# EAGLE board source_eagle (EAGLE 9.6.2)
REV: B
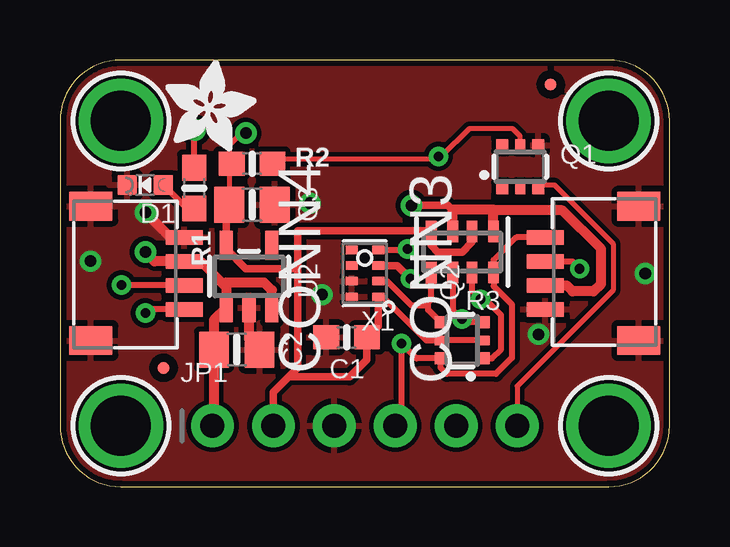
[diagram p0: board, top side]
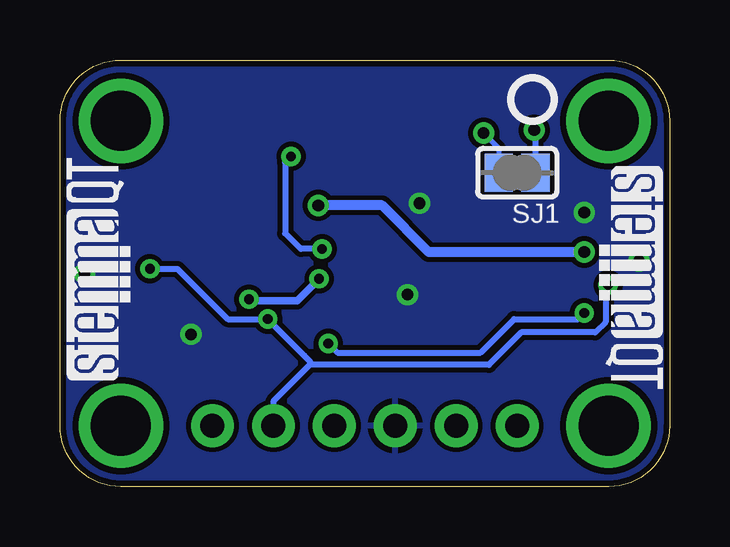
[diagram p1: board, bottom side, seen from below]

Size 25.4 x 17.78 mm. Coordinates in mm from the lower left corner, seen from the top.
Outline: 0,15.24 0,2.54 arc90 2.54,0 22.86,0 arc90 25.4,2.54 25.4,15.24 arc90 22.86,17.78 2.54,17.78 arc90 0,15.24
Copper layers (1*16): Top 0.035mm / dielectric 1.5mm / Bottom 0.035mm
Design rules "adafruit *": minimum track width 8mil, minimum drill 15.5mil, track to track 8mil, track to pad 8mil, pad to pad 8mil, via to via 8mil, smd to smd 8mil, copper to edge 10mil, drill to drill 8mil, minimum pad ring 10mil, minimum via ring 8mil, stop-mask expansion 2mil, vias tented up to drill 20mil, thermal gap 10mil
Net classes: 1 highpower: width 0.305 mm, drill 0.483 mm; 2 lowpower: width 0.254 mm, drill 0.483 mm

## Footprints (pad centres in the part's own frame; a part is rotated, then mirrored left to right if it is on the bottom)
0603-NO = smd 1.075 x 1: 1 -0.85,0; 2 0.85,0
0805-NO = smd 1.24 x 1.5: 1 -0.95,0; 2 0.95,0
JST_SH4 = smd 0.6 x 1.55: 1 -1.5,2.006; 2 -0.5,2.006; 3 0.5,2.006; 4 1.5,2.006 | smd 1.2 x 1.8: MT1 -2.8,-1.894; MT2 2.8,-1.894
CHIPLED_0603_NOOUTLINE = smd 0.8 x 0.8: A 0,-0.75; C 0,0.75
FIDUCIAL_0.5MM = smd 0.5 x 0.5: 1 0,0
1X06_ROUND_70 = drill 1 pad 1.778: 1 -6.35,0; 2 -3.81,0; 3 -1.27,0; 4 1.27,0; 5 3.81,0; 6 6.35,0
SOT363 = smd 0.5 x 0.5: 1 -0.75,-0.9; 3 0.75,-0.9; 4 0.75,0.9; 6 -0.75,0.9 | smd 0.4 x 0.5: 2 0,-0.9; 5 0,0.9
RESPACK_4X0603 = smd 0.45 x 0.9: 1 -1.3,-0.85; 2 -0.4,-0.85; 3 0.4,-0.85; 4 1.3,-0.85; 5 1.3,0.85; 6 0.4,0.85; 7 -0.4,0.85; 8 -1.3,0.85
SOLDERJUMPER_CLOSEDWIRE = smd 1.168 x 1.6: 1 -0.762,0; 2 0.762,0 | smd 0.635 x 0.203: WIRE 0,0
SOT23-5 = smd 0.55 x 1.2: 1 -0.95,-1.3; 2 0,-1.3; 3 0.95,-1.3; 4 0.95,1.3; 5 -0.95,1.3
MOUNTINGHOLE_2.5_PLATED = drill 2.5 pad 3.2: P$1 0,0
TCS34303 = smd 0.5 x 0.35: 1 -0.55,0.975; 2 -0.55,0.325; 3 -0.55,-0.325; 4 -0.55,-0.975; 5 0.55,-0.975; 6 0.55,-0.325; 7 0.55,0.325; 8 0.55,0.975

## Placement (x,y rotation side)
C1  0.1uF  [0603-NO]  11.94,6.22 180 top
C2  10uF  [0805-NO]  7.37,5.71 0 top
C3  10uF  [0805-NO]  8,11.75 0 top
CONN3  STEMMA_I2C_QT  [JST_SH4]  22.23,8.89 90 top
CONN4  STEMMA_I2C_QT  [JST_SH4]  3.17,8.89 270 top
D1  RED  [CHIPLED_0603_NOOUTLINE]  3.56,12.57 90 top
FID3  FIDUCIAL_0.5MM  [FIDUCIAL_0.5MM]  4.32,4.95 0 top
FID4  FIDUCIAL_0.5MM  [FIDUCIAL_0.5MM]  20.45,16.76 0 top
JP1  [1X06_ROUND_70]  12.7,2.54 0 top
PLABEL0  [PLABEL0]  6.35,0.89 0 top
PLABEL1  [PLABEL1]  8.89,4.19 0 top
PLABEL2  [PLABEL2]  11.43,0.89 0 top
PLABEL3  [PLABEL3]  13.97,4.19 0 top
PLABEL4  [PLABEL4]  16.51,0.89 0 top
PLABEL5  [PLABEL5]  19.18,4.06 0 top
PLABEL6  [PLABEL6]  13.59,16.64 0 top
PLABEL7  [PLABEL7]  0.38,12.45 0 top
PLABEL8  [PLABEL8]  12.95,13.84 0 top
PLABEL9  [PLABEL9]  12.7,1.02 0 bottom
PLABEL10  [PLABEL10]  9.53,13.34 0 bottom
PLABEL11  [PLABEL11]  14.13,15.97 0 bottom
PLABEL12  [PLABEL12]  12.57,10.03 0 bottom
PLABEL13  [PLABEL13]  12.95,5.46 0 bottom
Q1  BSS138  [SOT363]  19.18,13.34 0 top
Q2  BSS138  [SOT363]  16.76,6.1 90 top
R1  10K  [0603-NO]  5.59,12.45 270 top
R2  10K  [0603-NO]  8,13.46 0 top
R3  10KPack  [RESPACK_4X0603]  16.76,9.78 180 top
SJ1  [SOLDERJUMPER_CLOSEDWIRE]  6.35,13.08 180 bottom
U2  AP2127K-1.8  [SOT23-5]  7.87,8.76 0 top
U$1  MOUNTINGHOLE2.5  [MOUNTINGHOLE_2.5_PLATED]  2.54,15.24 0 top
U$9  MOUNTINGHOLE2.5  [MOUNTINGHOLE_2.5_PLATED]  2.54,2.54 0 top
U$17  MOUNTINGHOLE2.5  [MOUNTINGHOLE_2.5_PLATED]  22.86,15.24 0 top
U$20  MOUNTINGHOLE2.5  [MOUNTINGHOLE_2.5_PLATED]  22.86,2.54 0 top
U$22  [ADAFRUIT_3.5MM]  4.38,13.97 0 top
U$25  [PCBFEAT-REV-040]  5.71,16.13 0 bottom
U$30  [STEMMAQT]  22.48,4.45 90 bottom
U$31  [STEMMAQT]  2.92,13.34 270 bottom
X1  TCS34303  [TCS34303]  12.7,8.89 180 top

## Library data of the parts
C1-C3 FID3 FID4 JP1 R1-R3 SJ1 U$22 U$25 = microbuilder
CONN3 CONN4 = adafruit_electromech; LCSC: C2845363
D1 Q1 Q2 = microbuilder; JLC_ROTATION: 270
PLABEL0 PLABEL1-PLABEL13 = pinguin
U2 = adafruit_power; JLC_ROTATION: 270
U$1 U$9 U$17 U$20 = adafruit_electromech; BOM: EXCLUDE
U$30 U$31 = silks
X1 = adafruit_sensor

## Nets
1.8V: C1.1 C3.1 JP1.2 Q2.2 Q2.5 R2.1 R3.2 R3.4 SJ1.2 U2.5 X1.1
GND [highpower]: C1.2 C2.2 C3.2 CONN3.1 CONN3.MT1 CONN3.MT2 CONN4.1 CONN4.MT1 CONN4.MT2 D1.C JP1.3 Q1.4 U2.2 X1.7 X1.8
INT: JP1.6 Q1.3
INT_1.8V: Q1.5 R2.2 X1.4
N$1: D1.A R1.2
N$2 [lowpower]: R1.1 SJ1.1
SCL: CONN3.4 CONN4.4 JP1.4 Q2.6 R3.8
SCL_1.8V: Q2.1 R3.7 X1.3
SDA: CONN3.3 CONN4.3 JP1.5 Q2.3 R3.6
SDA_1.8V: Q2.4 R3.5 X1.2
VCC [highpower]: C2.1 CONN3.2 CONN4.2 JP1.1 R3.1 R3.3 U2.1 U2.3

## Tracks (layer width: path | path; a pad name or v marks a point on that pad's centre or on a via)
1.8V  (via drill 0.48)
  Top 0.203: v7.75,14.73 7.56,14.73 7.05,14.23 7.05,13.46 | 7.05,13.46 C3.1 | R2.1 7.05,13.46
  Top 0.254: Q2.2 Q2.5 15.27,6.1 13.45,7.92 X1.1 | R3.2 17.16,10.18
  Top 0.305: 17.16,10.18 16.76,9.78 15.75,9.78 15.46,10.06 R3.4 15.46,10.67 9.91,10.67 9.91,9.08 | X1.1 13.25,6.68 C1.1 12.79,5.29 12.06,4.57 9.53,4.57 | C3.1 6.92,11.62 U2.5 6.92,9.91 7.75,9.08 9.91,9.08 | 9.53,4.57 9.91,4.95 9.91,9.08 | 9.53,4.57 8.89,3.94 JP1.2
  Bottom 0.203: v7.75,14.73 7.11,14.1 SJ1.2
GND  (via drill 0.48)
  Top 0.406: U2.2 7.87,6.16 C2.2 | CONN4.1 4.6,10.39 v3.56,11.43
  other vias: 19.94,6.35 1.27,9.4 24.38,8.89 10.41,11.81 10.92,8
  pour Top: 0,17.78 25.4,17.78 25.4,0 0,0
  pour Bottom: 0,17.78 25.4,17.78 25.4,0 0,0
INT
  Top 0.203: Q1.3 20.07,12.57 20.59,12.57 23.05,10.12 23.05,8.19 19.05,4.19 JP1.6
INT_1.8V  (via drill 0.4)
  Top 0.203: R2.2 9.04,13.65 15.75,13.65 15.77,13.67 v15.77,13.76 15.89,13.76 17.05,14.92 18.86,14.92 19.18,14.61 Q1.5
  Top 0.254: X1.4 14.44,9.87 v14.48,9.91
  Bottom 0.254: v14.48,9.91 15.37,9.91 16.02,10.56 16.02,13.51 v15.77,13.76
N$1
  Top 0.254: D1.A 5.28,11.6 R1.2
N$2  (via drill 0.48)
  Top 0.254: R1.1 5.59,14.81 v5.64,14.86
  Bottom 0.254: v5.64,14.86 5.59,14.81 SJ1.1
SCL  (via drill 0.4)
  Top 0.254: CONN3.4 19.01,10.39 18.06,9.44 R3.8 18.06,8.36 18.83,7.6 18.83,5.36 18.16,4.7 16.13,4.7 15.86,4.96 Q2.6 | CONN4.4 3.71,7.39 v3.56,7.24 | Q2.6 | Q2.6 14.85,5.35 v14.22,5.97 14.22,5.46 14.22,2.79 JP1.4
  Bottom 0.254: v14.22,5.97 13.84,5.59 7.87,5.59 6.48,6.99 3.81,6.99 v3.56,7.24
SCL_1.8V  (via drill 0.4)
  Top 0.254: R3.7 17.16,8.17 v17.53,7.81 | 17.65,7.87 18.37,7.16 18.37,5.71 18,5.35 Q2.1
  Top 0.305: 17.65,7.87 17.53,7.87 v17.53,7.81 | v14.61,8.66 14.05,9.21 X1.3
  Bottom 0.305: v17.53,7.81 17.46,7.75 15.52,7.75 v14.61,8.66
SDA  (via drill 0.4)
  Top 0.254: R3.6 16.36,7.37 v16.75,6.99 16.88,6.85 Q2.3 | CONN4.3 v2.56,8.39 v2.56,8.4 | CONN3.3 21.34,9.39 v21.65,9.08
  Bottom 0.254: v2.56,8.4 2.67,8.3 2.67,6.86 3.1,6.43 6.18,6.43 7.53,5.08 14.99,5.08 | v21.65,9.08 20.51,9.08 18.41,6.99 v16.75,6.99 15.22,5.46 14.99,5.23 14.99,5.08 | JP1.5 16.51,3.56 14.99,5.08
SDA_1.8V
  Top 0.254: Q2.4 15.34,7.37 15.34,7.55 | 15.34,7.55 15.34,7.68 15.46,7.8 R3.5 | 15.34,7.55 14.65,7.55 13.63,8.56 X1.2
VCC  (via drill 0.48)
  Top 0.305: 16.36,11.56 16.34,11.54 16.16,11.72 v14.64,11.72
  Top 0.406: U2.3 8.82,8.19 8.51,8.51 6.92,8.51 6.92,8.32 | 6.92,8.32 U2.1 6.42,6.96 C2.1 6.42,2.61 JP1.1 | 6.92,8.32 5.86,9.39 CONN4.2 3.94,9.39 v3.56,9.78 | R3.1 18.03,10.66 18.03,11.52 | CONN3.2 21.11,8.39 21.36,8.14 22.23,8.14 22.54,8.45 22.54,9.91 20.93,11.52 18.03,11.52 | 18.03,11.52 18.03,11.56 16.36,11.56 R3.3
  Bottom 0.406: v3.56,9.78 10.03,9.78 11.98,11.72 v14.64,11.72

## Text on the board
Pinguin_tBackup: TCS3430(3) | Tri-Stimulus / Color | on | 1V8 | SCL | INT | VIN | GND | SDA
Pinguin_bBackup: TCS34303 | LED | Tri-Stimulus / XYZ Color Sensor | I2C address 0x39 | VLogic/Vcc: 3-5VDC